# Altium PCB Copy of PCB.PcbDoc (part 1 of 3)
Units mil, origin at the board's own origin, x right, y up, seen from the top; angles counter-clockwise.
Board outline 5610.24 x 866.55 mil, 2 copper layers (Top Layer, Bottom Layer), stack 62.17 mil thick; 160 components, 90 nets, 485 pads, 247 vias.
Unrouted connection lines stored in the file: 5.
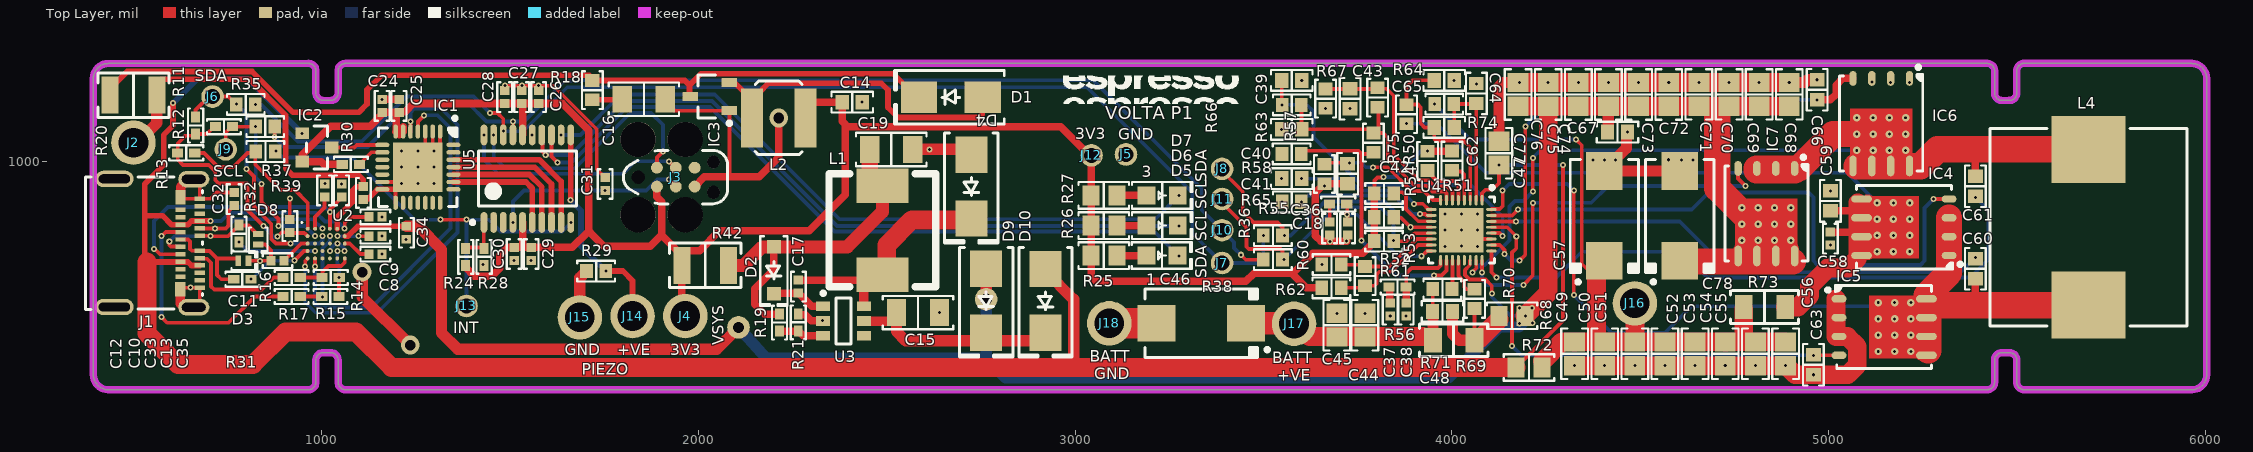
[diagram p0: Top Layer view]
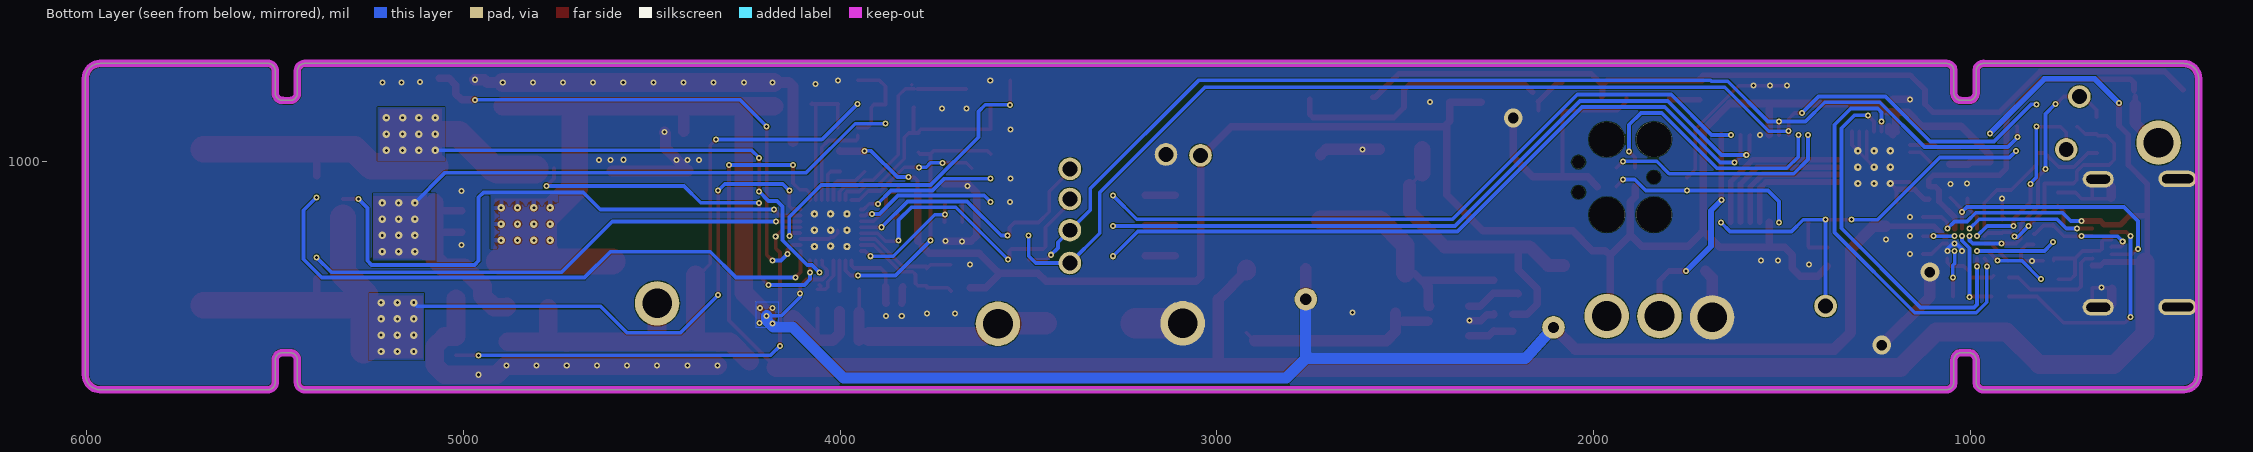
[diagram p1: Bottom Layer view, seen from below]

## Layer stack, top to bottom
Top Solder: solder mask 0.4, Solder Resist, Dk 3.5
Top Layer: signal copper 1.4
Dielectric 1: dielectric 59.3701, FR-4, Dk 4.8
Bottom Layer: signal copper 1.4
Bottom Solder: solder mask 0.4, Solder Resist, Dk 3.5

## Board outline
433.07,393.7 964.57,393.7 ccw(c964.57,413.39) 984.25,413.39 984.25,472.44 cw(c1003.94,472.44) 1003.94,492.13 1023.62,492.13 cw(c1023.62,472.44) 1043.31,472.44 1043.31,413.39 ccw(c1062.99,413.39) 1062.99,393.7 5421.26,393.7 ccw(c5421.26,413.39) 5440.94,413.39 5440.94,472.44 cw(c5460.63,472.44) 5460.63,492.13 5480.31,492.13 5480.31,492 cw(c5480.31,472.32) 5500,472.32 5500,413.26 ccw(c5519.69,413.26) 5519.69,393.58 5519.69,393.7 5964.57,393.7 ccw(c5964.57,433.07) 6003.94,433.07 6003.94,1220.47 ccw(c5964.57,1220.47) 5964.57,1259.84 5964.57,1260 5519.69,1260 5519.69,1260.12 ccw(c5519.69,1240.44) 5500,1240.44 5500,1181.38 cw(c5480.31,1181.38) 5480.31,1161.7 5480.31,1161.57 5460.63,1161.57 cw(c5460.63,1181.26) 5440.94,1181.26 5440.94,1240.32 ccw(c5421.26,1240.32) 5421.26,1260 1062.99,1260 ccw(c1062.99,1240.31) 1043.31,1240.31 1043.31,1181.26 cw(c1023.62,1181.26) 1023.62,1161.57 1003.94,1161.57 cw(c1003.94,1181.26) 984.25,1181.26 984.25,1240.31 ccw(c964.57,1240.31) 964.57,1260 964.57,1259.84 433.07,1259.84 ccw(c433.07,1220.47) 393.7,1220.47 393.7,433.07 ccw(c433.07,433.07)

## Design rules (kind name [scope] priority, off if disabled: settings)
Clearance [All] p1: gap=2 ignorepadtopadclearanceinfootprint=TRUE
MinimumSolderMaskSliver [All] p1: minsoldermaskwidth=1
PolygonConnect PolygonConnect_18 [All vs IsNamedPolygon('GND_L02_P024')] p1: connectstyle=Direct reliefconductorwidth=10 reliefentries=4 polygonreliefangle="90 Angle" airgapwidth=10
PolygonConnect PolygonConnect_17 [All vs IsNamedPolygon('NETC15_2_L02_P018')] p2: connectstyle=Direct reliefconductorwidth=10 reliefentries=4 polygonreliefangle="90 Angle" airgapwidth=10
PolygonConnect PolygonConnect_16 [All vs IsNamedPolygon('NETC15_2_L02_P022')] p3: connectstyle=Direct reliefconductorwidth=10 reliefentries=4 polygonreliefangle="90 Angle" airgapwidth=10
PolygonConnect PolygonConnect_15 [All vs IsNamedPolygon('GND_L02_P028')] p4: connectstyle=Direct reliefconductorwidth=10 reliefentries=4 polygonreliefangle="90 Angle" airgapwidth=10
PolygonConnect PolygonConnect_14 [All vs IsNamedPolygon('GND_L02_P026')] p5: connectstyle=Direct reliefconductorwidth=10 reliefentries=4 polygonreliefangle="90 Angle" airgapwidth=10
PolygonConnect PolygonConnect_13 [All vs IsNamedPolygon('GND_L02_P022')] p6: connectstyle=Direct reliefconductorwidth=10 reliefentries=4 polygonreliefangle="90 Angle" airgapwidth=10
PolygonConnect PolygonConnect_12 [All vs IsNamedPolygon('NETC61_2_L02_P020') Or  IsNamedPolygon('NETC15_2_L02_P018') Or  IsNamedPolygon('NETC60_2_L02_P002') Or  IsNamedPolygon('NETC58_2_L02_P016')] p7: connectstyle=Direct reliefconductorwidth=10 reliefentries=4 polygonreliefangle="90 Angle" airgapwidth=10
PolygonConnect PolygonConnect_11 [All vs IsNamedPolygon('GND_L02_P016')] p8: thpad.connectstyle=Direct thpad.reliefconductorwidth=10 thpad.reliefentries=4 thpad.polygonreliefangle="90 Angle" thpad.airgapwidth=10 smdpad.connectstyle=Relief smdpad.reliefconductorwidth=10 smdpad.reliefentries=4 smdpad.polygonreliefangle="90 Angle" smdpad.airgapwidth=10 via.connectstyle=Relief via.reliefconductorwidth=10 via.reliefentries=4 via.polygonreliefangle="90 Angle" via.airgapwidth=10
PolygonConnect PolygonConnect_10 [All vs IsNamedPolygon('GND_L04_P002')] p9: connectstyle=Relief reliefconductorwidth=10 reliefentries=4 polygonreliefangle="90 Angle" airgapwidth=5
PolygonConnect Test [All vs IsNamedPolygon('GND_L01_P014')] p10: connectstyle=Direct reliefconductorwidth=10 reliefentries=4 polygonreliefangle="90 Angle" airgapwidth=10
PolygonConnect PolygonConnect_9 [All vs IsNamedPolygon('GND_L01_P014')] p11: connectstyle=Direct reliefconductorwidth=10 reliefentries=4 polygonreliefangle="90 Angle" airgapwidth=10
PolygonConnect PolygonConnect_8 [All vs IsNamedPolygon('NETC1_2_L01_P010')] p12: connectstyle=Direct reliefconductorwidth=10 reliefentries=4 polygonreliefangle="90 Angle" airgapwidth=10
PolygonConnect PolygonConnect_7 [All vs IsNamedPolygon('NETC23_2_L01_P012')] p13: connectstyle=Direct reliefconductorwidth=10 reliefentries=4 polygonreliefangle="90 Angle" airgapwidth=10
PolygonConnect PolygonConnect_6 [All vs IsNamedPolygon('NETC1_2_L01_P010')] p14: connectstyle=Direct reliefconductorwidth=10 reliefentries=4 polygonreliefangle="90 Angle" airgapwidth=10
PolygonConnect PolygonConnect_5 [All vs IsNamedPolygon('NETC1_2_L01_P010')] p15: connectstyle=Direct reliefconductorwidth=10 reliefentries=4 polygonreliefangle="90 Angle" airgapwidth=10
PolygonConnect PolygonConnect_4 [All vs IsNamedPolygon('NETC7_2_L01_P008')] p16: connectstyle=Direct reliefconductorwidth=10 reliefentries=4 polygonreliefangle="90 Angle" airgapwidth=10
PolygonConnect PolygonConnect_3 [All vs IsNamedPolygon('NETC7_2_L01_P008')] p17: connectstyle=Direct reliefconductorwidth=10 reliefentries=4 polygonreliefangle="90 Angle" airgapwidth=10
PolygonConnect PolygonConnect_2 [All vs IsNamedPolygon('NETC2_2_L01_P006')] p18: connectstyle=Direct reliefconductorwidth=10 reliefentries=4 polygonreliefangle="90 Angle" airgapwidth=10
PolygonConnect "Full Connection Pour" [All vs IsNamedPolygon('GND_L01_P004')] p19: connectstyle=Direct reliefconductorwidth=10 reliefentries=4 polygonreliefangle="90 Angle" airgapwidth=10
PolygonConnect PolygonConnect_1 [All vs IsNamedPolygon('GND_L01_P004')] p20: thpad.connectstyle=Direct thpad.reliefconductorwidth=10 thpad.reliefentries=4 thpad.polygonreliefangle="90 Angle" thpad.airgapwidth=10 smdpad.connectstyle=Direct smdpad.reliefconductorwidth=10 smdpad.reliefentries=4 smdpad.polygonreliefangle="90 Angle" smdpad.airgapwidth=10 via.connectstyle=Relief via.reliefconductorwidth=10 via.reliefentries=4 via.polygonreliefangle="90 Angle" via.airgapwidth=10
PolygonConnect [All] p21: connectstyle=Relief reliefconductorwidth=10 reliefentries=4 polygonreliefangle="90 Angle" airgapwidth=10
RoutingVias [All] p1: holewidth=28 width=50 viastyle="Through Hole" minholewidth=28 minwidth=50 maxholewidth=28 maxwidth=50
SilkToSilkClearance [All] p1: silktosilkclearance=1
SilkToSolderMaskClearance [IsPad] p1: minsilkscreentomaskgap=1 clearancetoexposedcopper=TRUE
SolderMaskExpansion [All] p1: expansion=4
Width [All] p1: maxlimit=100 minlimit=6 preferedwidth=10
27 further rules are at their usual default settings.

## Classes and differential pairs
component class Charging_TI: C18 C36 C37 C38 C39 C40 C41 C42 C43 C44 C45 C46 C47 C48 J17 J18 R50 R51 R52 R53 R54 R55 R56 R57 R58 R60 R61 R62 R63 R64 R65 R66 R67 R68 R69 R70 R71 U4
component class Charging_TI_2: C49 C50 C51 C52 C53 C54 C55 C56 C57 C58 C59 C60 C61 C62 C63 C64 C65 C66 C67 C68 C69 C70 C71 C72 C73 C74 C75 C76 C77 C78 IC4 IC5 IC6 IC7 J16 L4 R72 R73 R74 R75
component class Microcontroller: C24 C25 C26 C27 C28 C29 C30 C31 D5 D6 D7 IC1 IC2 J3 J5 J6 J7 J8 J9 J10 J11 J12 J13 J14 J15 R24 R25 R26 R27 R28 R29 R30 R35 R36 R37 R38 R39 U5
component class Voltage_Regulation: C14 C15 C16 C17 C19 D1 D2 D4 D9 D10 IC3 J2 J4 L1 L2 R18 R19 R20 R21 R42 U3
component class PD_Controller: C8 C9 C10 C11 C12 C13 C32 C33 C34 C35 D3 D8 J1 R11 R12 R13 R14 R15 R16 R17 R31 R32 U2

## Components (designator, comment, footprint, x,y, rotation, side; value= is the part's Value field where it differs from the comment)
C8 "2.2 µF" "CAP 0402_1005" 1142.36,753.66 r180 top
C9 "1 µF" "CAP 0402_1005" 1142.36,801.38 r180 top
C10 "1 µF" "CAP 0402_1005" 1007.36,922.76 r270 top
C11 "1 µF" "CAP 0402_1005" 882.36,736.34 r0 top
C12 "1 µF" "CAP 0402_1005" 915,828 r270 top
C13 "1 µF" "CAP 0402_1005" 1110.24,916.34 r90 top
C14 "47 µF" "CAP 0603_1608" 2408,1157 r180 top
C15 "10 µF" "CAP 1206_3216 - 0.8MM" 2582.68,598.43 r180 top
C16 "22 µF" "CAP 1206_3216 - 0.8MM" 1855,1165 r0 top
C17 "10000 pF" "CAP 0402_1005" 2265,667.52 r270 top
C18 "33 pF" "CAP 0402_1005" 3723.39,821.64 r90 top
C19 "22 µF" "CAP 1206_3216 - 0.8MM" 2511.81,1031.5 r0 top
C24 "4.7 µF" "CAP 0402_1005" 1160.04,1147.2 r270 top
C25 "0.1 µF" "CAP 0402_1005" 1205.04,1147.2 r270 top
C26 "4.7 µF" "CAP 0402_1005" 1575.47,1170.39 r270 top
C27 "0.1 µF" "CAP 0402_1005" 1530.47,1170.39 r270 top
C28 "0.1 µF" "CAP 0402_1005" 1485.47,1170.39 r270 top
C29 "1 µF" "CAP 0402_1005" 1555.75,754.01 r90 top
C30 "10000 pF" "CAP 0402_1005" 1510.75,754.01 r90 top
C31 "0.1 µF" "CAP 0402_1005" 1751.97,939.76 r270 top
C32 "27 pF" "CAP 0402_1005" 767.36,899.61 r270 top
C33 "27 pF" "CAP 0402_1005" 1052.36,922.76 r270 top
C34 "1 µF" "CAP 0402_1005" 1224.41,810.37 r90 top
C35 "1 µF" "CAP 0402_1005" 1142.36,852.49 r180 top
C36 "4700 pF" "CAP 0402_1005" 3675.71,821.64 r90 top
C37 "680 pF" "CAP 0402_1005" 3836.54,606.54 r90 top
C38 "15 pF" "CAP 0402_1005" 3878.38,606.54 r90 top
C39 "2.2 µF" "CAP 0603_1608" 3575,1215 r180 top
C40 "1 µF" "CAP 0603_1608" 3575,1085 r0 top
C41 "100 pF" "CAP 0603_1608" 3575,954.25 r0 top
C42 "100 pF" "CAP 0603_1608" 3723.39,967.01 r90 top
C43 "100 pF" "CAP 0603_1608" 3730,1166.37 r90 top
C44 "10 µF" "CAP 0805_2012" 3769.41,565 r270 top
C45 "10 µF" "CAP 0805_2012" 3695,565 r270 top
C46 "33 µF" "CAP POL 2917_7343" 3334.65,570 r180 top
C47 "0.47 µF" "CAP 0805_2012" 4125,1021.5 r270 top
C48 "0.1 µF" "CAP 0603_1608" 3975.08,601.5 r180 top
C49 "10 µF" "CAP 0805_2012" 4325.91,488.96 r90 top
C50 "10 µF" "CAP 0805_2012" 4405.91,488.96 r90 top
C51 "10 µF" "CAP 0805_2012" 4485.91,488.96 r90 top
C52 "10 µF" "CAP 0805_2012" 4565.91,488.96 r90 top
C53 "10 µF" "CAP 0805_2012" 4645.91,488.96 r90 top
C54 "10 µF" "CAP 0805_2012" 4725.91,488.96 r90 top
C55 "10 µF" "CAP 0805_2012" 4805.91,488.96 r90 top
C56 "10 µF" "CAP 0805_2012" 4885.91,488.96 r90 top
C57 "33 µF" "CAP POL 2917_7343" 4405,855 r90 top
C58 "1000 pF" "CAP 0402_1005" 5004.77,795 r90 top
C59 "10000 pF" "CAP 0603_1608" 5005,895 r270 top
C60 "0.047 µF" "CAP 0603_1608" 5390,715 r270 top
C61 "0.047 µF" "CAP 0603_1608" 5390,934.09 r90 top
C62 "10000 pF" "CAP 0603_1608" 3980,1090 r0 top
C63 "150 pF" "CAP 0603_1608" 4960,460 r90 top
C64 "0.033 µF" "CAP 0603_1608" 4065,1180 r270 top
C65 "0.033 µF" "CAP 0603_1608" 3979.68,1215.01 r180 top
C66 "150 pF" "CAP 0603_1608" 4970,1190 r270 top
C67 "10000 pF" "CAP 0603_1608" 4440,1077.52 r180 top
C68 "10 µF" "CAP 0805_2012" 4895.91,1177.76 r270 top
C69 "10 µF" "CAP 0805_2012" 4815.91,1177.76 r270 top
C70 "10 µF" "CAP 0805_2012" 4735.91,1177.76 r270 top
C71 "10 µF" "CAP 0805_2012" 4655.91,1177.76 r270 top
C72 "10 µF" "CAP 0805_2012" 4575.91,1177.55 r270 top
C73 "10 µF" "CAP 0805_2012" 4495.91,1177.55 r270 top
C74 "10 µF" "CAP 0805_2012" 4415.91,1177.55 r270 top
C75 "10 µF" "CAP 0805_2012" 4335.91,1177.55 r270 top
C76 "10 µF" "CAP 0805_2012" 4255.91,1177.55 r270 top
C77 "10 µF" "CAP 0805_2012" 4175.91,1177.55 r270 top
C78 "33 µF" "CAP POL 2917_7343" 4605,855 r90 top
D1 "B230-13-F" "DO214AA SMB" 2670,1170 r180 top
D2 "1N4148W-TP" SOD-123 2200,710.79 r270 top
D3 "LXES15AAA1-153" 0402 792,736 r0 top
D4 "B230-13-F" "DO214AA SMB" 2724.41,933.07 r270 top
D5 "White" "LED 0805_2012" 3230.43,750 r0 top
D6 "White" "LED 0805_2012" 3231.06,829.53 r0 top
D7 "White" "LED 0805_2012" 3231.06,909.53 r0 top
D8 "LXES15AAA1-153" 0402 831,793.04 r270 top
D9 "B230-13-F" "DO214AA SMB" 2763.78,629.92 r270 top
D10 "B230-13-F" "DO214AA SMB" 2921.26,629.65 r270 top
IC1 "CP2102N-A02-GQFN28R" "SILICON LABS QFN-28 5x5MM" 1255.04,984.53 r270 top
IC2 "DMN67D8L-7" "DIODES SOT-23-3" 987,1037 r0 top
IC3 "HT7750B" SOT95P280X145-3N 2030,1172 r180 top
IC4 "BSC020N03MSGATMA1" "INFINEON PG-TDSON-8 6.15X5.32MM" 5200,825 r180 top
IC5 "BSC020N03MSGATMA1" "INFINEON PG-TDSON-8 6.15X5.32MM" 5147.87,560 r0 top
IC6 "BSC020N03MSGATMA1" "INFINEON PG-TDSON-8 6.15X5.32MM" 5140,1100 r270 top
IC7 "BSC020N03MSGATMA1" "INFINEON PG-TDSON-8 6.15X5.32MM" 4835,861.06 r270 top
J1 "1054500101" "Molex 1054500101" 650.39,782.58 r270 top
J2 "Large Board Solder Point" "LARGE SOLDER POINT" 500,1049.56 r0 top
J3 "ICD connector" TC2030-MCP 1939.76,958.11 r0 top
J4 "Large Board Solder Point" "LARGE SOLDER POINT" 1965,589.21 r0 top
J5 "Small Board Solder Point" "SMALL SOLDER POINT" 3135,1018.27 r180 top
J6 "Small Board Solder Point" "SMALL SOLDER POINT" 710,1172 r0 top
J7 "Small Board Solder Point" "SMALL SOLDER POINT" 3390,730 r0 top
J8 "Small Board Solder Point" "SMALL SOLDER POINT" 3390,980 r0 top
J9 "Small Board Solder Point" "SMALL SOLDER POINT" 744.92,1031.69 r0 top
J10 "Small Board Solder Point" "SMALL SOLDER POINT" 3390,817.13 r180 top
J11 "Small Board Solder Point" "SMALL SOLDER POINT" 3390,900 r0 top
J12 "Small Board Solder Point" "SMALL SOLDER POINT" 3043.31,1015.75 r270 top
J13 "Small Board Solder Point" "SMALL SOLDER POINT" 1384,616 r180 top
J14 "Large Board Solder Point" "LARGE SOLDER POINT" 1825,589.21 r0 top
J15 "Large Board Solder Point" "LARGE SOLDER POINT" 1685,585.79 r0 top
J16 "Large Board Solder Point" "LARGE SOLDER POINT" 4485.91,623 r0 top
J17 "Large Board Solder Point" "LARGE SOLDER POINT" 3581.13,568.82 r0 top
J18 "Large Board Solder Point" "LARGE SOLDER POINT" 3090.55,570 r0 top
L1 "10uH" 0630CDMCCDS-100MC 2488.19,817.13 r90 top
L2 "47 µH" "TAIYO YUDEN NRS5030" 2213,1115 r180 top
L4 "4.7 µH" "WURTH WE-HCI 1365" 5690,825 r180 top
R11 "2.2 kOhms" "RES 0402_1005" 740,1092 r0 top
R12 "2.2 kOhms" "RES 0402_1005" 665,1095 r90 top
R13 "200 kOhms" "RES 0402_1005" 640,1022.42 r180 top
R14 "649 kOhms" "RES 0402_1005" 1023.58,691.34 r0 top
R15 "649 kOhms" "RES 0402_1005" 1022.64,641.34 r0 top
R16 "120 kOhms" "RES 0402_1005" 920,691.34 r0 top
R17 "120 kOhms" "RES 0402_1005" 920,641.34 r0 top
R18 "150 mOhms" "RES 0603_1608" 1718,1189 r90 top
R19 "100 kOhms" "RES 0402_1005" 2215,571.77 r90 top
R20 "0 Ohms" "RES 1210_3225" 500,1176 r0 top
R21 "32.4 kOhms" "RES 0402_1005" 2265,572.52 r270 top
R24 "510 Ohms" "RES 0402_1005" 1381.94,746.4 r90 top
R25 "10 Ohms" "RES 0805_2012" 3076.06,749.53 r180 top
R26 "10 Ohms" "RES 0805_2012" 3076.06,829.53 r180 top
R27 "10 Ohms" "RES 0805_2012" 3076.06,909.61 r180 top
R28 "510 Ohms" "RES 0402_1005" 1430.91,746.4 r90 top
R29 "1 MOhms" "RES 0603_1608" 1728.35,708.66 r0 top
R30 "1 kOhms" "RES 0402_1005" 1077,992 r0 top
R31 "1 Ohms" "RES 0402_1005" 789,687 r180 top
R32 "1 Ohms" "RES 0402_1005" 780.16,808 r90 top
R35 "0 Ohms" "RES 0603_1608" 797.97,1151.29 r0 top
R36 "0 Ohms" "RES 0603_1608" 3525,802.56 r0 top
R37 "0 Ohms" "RES 0603_1608" 849.97,1092.24 r0 top
R38 "0 Ohms" "RES 0603_1608" 3525,738.93 r0 top
R39 "0 Ohms" "RES 0603_1608" 850.39,1026.1 r0 top
R42 "0 Ohms" "RES 1210_3225" 2018.01,723.78 r180 top
R50 "10 kOhms" "RES 0603_1608" 3935.52,1001.22 r90 top
R51 "10 kOhms" "RES 0603_1608" 4000.52,1001.81 r90 top
R52 "10 kOhms" "RES 0603_1608" 3820,788.11 r180 top
R53 "10 kOhms" "RES 0603_1608" 3820,851.48 r180 top
R54 "10 kOhms" "RES 0603_1608" 3820,915 r180 top
R55 "40.2 kOhms" "RES 0402_1005" 3698.39,886.97 r0 top
R56 "15 kOhms" "RES 0402_1005" 3856.1,666.54 r0 top
R57 "150 kOhms" "RES 0603_1608" 3791.97,1049.56 r270 top
R58 "100 kOhms" "RES 0603_1608" 3574.8,1019.68 r180 top
R60 "300 kOhms" "RES 0603_1608" 3680.59,725.72 r180 top
R61 "2 MOhms" "RES 0603_1608" 3770,695.27 r270 top
R62 "10 kOhms" "RES 0603_1608" 3680.35,664.27 r0 top
R63 "10 Ohms" "RES 0603_1608" 3575,1150 r0 top
R64 "383 kOhms" "RES 0603_1608" 3803.15,1169.29 r270 top
R65 "30.1 kOhms" "RES 0603_1608" 3575,892.6 r0 top
R66 "191 kOhms" "RES 0603_1608" 3661.59,966.42 r90 top
R67 "220 kOhms" "RES 0603_1608" 3665,1166.37 r90 top
R68 "0 Ohms" "RES 0805_2012" 4160,590 r180 top
R69 "5 mOhms" "RES 1206_3216" 4005,525 r180 top
R70 "10 Ohms" "RES 0603_1608" 4060.48,635 r270 top
R71 "10 Ohms" "RES 0603_1608" 3975,660.72 r180 top
R72 "0 Ohms" "RES 0805_2012" 4205,452.63 r0 top
R73 "5 mOhms" "RES 1206_3216" 4830,613.29 r0 top
R74 "4.99 Ohms" "RES 0603_1608" 3980,1152 r180 top
R75 "4.99 Ohms" "RES 0603_1608" 3879.68,1125.01 r270 top
U2 "MAX77958EWV+" BGA30C50P6X5_307X262X64 1011.58,781.69 r0 top
U3 "RT8258GE" SOT100P279X130-6N 2385,576 r0 top
U4 "BQ25731RSNR" QFN40P400X400X80_HS-33N 4025.28,817.13 r270 top
U5 "STM32F030F4P6" TSOP65P640X120-20N 1545.75,954.01 r90 top

## Footprints (in the part's own frame and the unit in brackets; to place one, negate y for a bottom-side part, rotate by r counter-clockwise, add the part's x,y. Pads: shape width x height; smd on the part's side, far side on the other; paste and mask are expansions set on the pad)
0402 [mm] "SODFL, 2-Leads, Body 0.675x1.075mm, IPC Medium Density"
  rect 0.4x0.7 smd: 1(-0.35,0) 2(0.35,0)
  silkscreen extent -0.8,-0.63 0.92,0.63, body extent -0.51,-0.31 0.5,0.3, height 0.45
0630CDMCCDS-100MC [mm] "SMD,7x6.6x2.8mm"
  rect 2.35x3.5 smd: 1(-3,0) 2(3,0)
  silkscreen extent -3.8,-3.6 3.8,3.6, body extent -3.5,-3.3 3.5,3.3, height 3
BGA30C50P6X5_307X262X64 [mm] "BGA, 30-Leads, Body 3.07x2.62mmx0.64mm, Pitch 0.50mm"
  round 0.26 smd: A1(-1.25,1) A2(-0.75,1) A3(-0.25,1) A4(0.25,1) A5(0.75,1) A6(1.25,1) B1(-1.25,0.5) B2(-0.75,0.5) B3(-0.25,0.5) B4(0.25,0.5) B5(0.75,0.5) B6(1.25,0.5) C1(-1.25,0) C2(-0.75,0) C3(-0.25,0) C4(0.25,0) C5(0.75,0) C6(1.25,0) D1(-1.25,-0.5) D2(-0.75,-0.5) D3(-0.25,-0.5) D4(0.25,-0.5) D5(0.75,-0.5) D6(1.25,-0.5) E1(-1.25,-1) E2(-0.75,-1) E3(-0.25,-1) E4(0.25,-1) E5(0.75,-1) E6(1.25,-1)
  silkscreen extent -1.69,1.37 -1.59,1.46, body extent -1.54,-1.31 1.54,1.31, height 0.64
"CAP 0402_1005" [mm] "Chip Capacitor, 2-Leads, Body 1.02x0.51mm, IPC Medium Density"
  rect 0.6x0.64 smd: 1(-0.44,0) 2(0.44,0)
  silkscreen extent -1,-0.5 1,0.5, body extent -0.5,-0.26 0.5,0.26, height 0.52
"CAP 0603_1608" [mm] "Chip Capacitor, 2-Leads, Body 1.60x0.80mm, IPC Medium Density"
  rect 0.9x1 smd: 1(-0.675,0) 2(0.675,0)
  silkscreen extent -1.4,-0.7 1.4,0.7, body extent -0.8,-0.41 0.8,0.41, height 0.82
"CAP 0805_2012" [mm] "Chip Capacitor, 2-Leads, Body 2.00x1.20mm, IPC Medium Density"
  rect 1.3x1.4 smd: 1(-0.8,0) 2(0.8,0)
  silkscreen extent -1.7,-0.9 1.7,0.9, body extent -1,-0.64 1,0.64, height 1.26
"CAP 1206_3216 - 0.8MM" [mm] "Chip Capacitor, 2-Leads, Body 3.25x1.60mm, IPC Medium Density"
  rect 1.3x1.8 smd: 1(-1.45,0) 2(1.45,0)
  silkscreen extent -2.37,-1.12 2.37,1.12, body extent -1.6,-0.8 1.6,0.8, height 0.8
"CAP POL 2917_7343" [mm] "Molded Capacitor, 2-Leads, Body 7.30x4.30mm, IPC Medium Density"
  rect 2.55x2.45 smd: 1(-3.025,0) 2(3.025,0)
  silkscreen extent -4.58,-2.3 3.8,2.3, body extent -3.65,-2.15 3.65,2.15, height 4.1
"DIODES SOT-23-3" [mm] "SOT23, 3-Leads, Body 2.90x2.40mm, Pitch 0.95mm, IPC Medium Density"
  rect 0.9x0.8 smd: 1(-1,0.95) 2(-1,-0.95) 3(1,0)
  silkscreen extent -0.7,-1.45 0.7,1.45, body extent -1.41,-1.45 1.41,1.45, height 1.5
"DO214AA SMB" [mm] "Molded Diode, 2-Leads, Body 4.31x3.62mm, IPC Medium Density"
  rect 2.45x2.15 smd: 1(-2.15,0) 2(2.15,0)
  silkscreen extent -3.6,-1.8 3.8,1.8, body extent -2.6,-1.8 2.6,1.8, height 2.4
"INFINEON PG-TDSON-8 6.15X5.32MM" [mm] "TDSON, 8-Leads, Body 6.15x5.32mm, Pitch 1.27mm, Thermal Pad 3.60x4.05mm, IPC Medium Density"
  oval 1x0.5 smd: 1(-3.05,1.905) 2(-3.05,0.635) 3(-3.05,-0.635) 4(-3.05,-1.905)
  oval 1.4x0.5 smd: 5(2.85,-1.905) 6(2.85,-0.635) 7(2.85,0.635) 8(2.85,1.905)
  Top Layer region: -1,2.1 -1,-2.1 2.059,-2.1 2.189,-2.126 2.3,-2.2 2.3,-2.2 2.6,-2.2 2.6,2.2 2.3,2.2 2.189,2.126 2.059,2.1 2.059,2.1
  silkscreen extent -3.93,-2.8 3.2,2.8, body extent -3.18,-2.74 3.18,2.75, height 1.1
"LARGE SOLDER POINT" [mm]
  round 3 hole 2: 1(0,0)
"LED 0805_2012" [mm] "Chip Diode, 2-Leads, Body 2.00x1.25mm, IPC Medium Density"
  rect 1.2x1.2 smd: 1(-1.05,0) 2(1.05,0)
  silkscreen extent -2.03,-0.9 2.03,0.9, body extent -1,-0.62 1,0.63, height 0.9
"Molex 1054500101" [mm] "USB-C Receptacle Connector 24 Position Surface Mount, 24 Position, Body 8.94x7.90mm"
  rect 0.3x0.7 smd: A1(-3,0.655) A2(-2.5,0.655) A3(-2,0.655) A4(-1.5,0.655) A5(-1,0.655) A6(-0.5,0.655) A7(0.5,0.655) A8(1,0.655) A9(1.5,0.655) A10(2,0.655) A11(2.5,0.655) A12(3,0.655) B2(2.25,-0.645) B3(1.75,-0.645) B4(1.25,-0.645) B5(0.75,-0.645) B6(0.25,-0.645) B7(-0.25,-0.645) B8(-0.75,-0.645) B9(-1.25,-0.645) B10(-1.75,-0.645) B11(-2.25,-0.645)
  rect 1x0.7 smd: B1(3.1,-0.655) B12(-3.1,-0.645)
  oval 1.1x2.6 hole 2.1 slot 0.6 at 0 deg: S(-4.34,-5.105) S(4.3,-5.105)
  oval 1.1x2.1 hole 1.6 slot 0.6 at 0 deg: S(-4.32,0.245) S(4.32,0.245)
  silkscreen extent -4.47,-7.07 4.47,0.83, body extent -4.47,-7.07 4.47,0.83, height 3.21
QFN40P400X400X80_HS-33N [mm] "QFN, 32-Leads, Body 4.00x4.00mm, Pitch 0.40mm, Thermal Pad 3.00x3.00mm, IPC Medium Density"
  oval 0.7x0.2 smd mask+0.05: 1(-2.025,1.4) 2(-2.025,1) 3(-2.025,0.6) 4(-2.025,0.2) 5(-2.025,-0.2) 6(-2.025,-0.6) 7(-2.025,-1) 8(-2.025,-1.4) 17(2.025,-1.4) 18(2.025,-1) 19(2.025,-0.6) 20(2.025,-0.2) 21(2.025,0.2) 22(2.025,0.6) 23(2.025,1) 24(2.025,1.4)
  oval 0.2x0.7 smd mask+0.05: 9(-1.4,-2.025) 10(-1,-2.025) 11(-0.6,-2.025) 12(-0.2,-2.025) 13(0.2,-2.025) 14(0.6,-2.025) 15(1,-2.025) 16(1.4,-2.025) 25(1.4,2.025) 26(1,2.025) 27(0.6,2.025) 28(0.2,2.025) 29(-0.2,2.025) 30(-0.6,2.025) 31(-1,2.025) 32(-1.4,2.025)
  round 0.5 hole 0.2: 33(-1.1,1.1) 33(-1.1,0) 33(-1.1,-1.1) 33(0,1.1) 33(0,-1.1) 33(1.075,0) 33(1.1,1.1) 33(1.1,-1.1)
  rect 3x3 smd mask+0.05: 33(0,0)
  silkscreen extent -3,-2.22 2.22,2.22, body extent -2.07,-2.07 2.07,2.07, height 0.8
"RES 0402_1005" [mm] "Chip Resistor, 2-Leads, Body 1.0x0.5mm, IPC Medium Density"
  rect 0.75x0.6 smd: 1(-0.575,0) 2(0.575,0)
  silkscreen extent -1.14,-0.51 1.14,0.51, body extent -0.5,-0.25 0.5,0.25, height 0.35
"RES 0603_1608" [mm] "Chip Resistor, 2-Leads, Body 1.60x0.80mm, IPC Medium Density"
  rect 0.85x0.95 smd: 1(-0.65,0) 2(0.65,0)
  silkscreen extent -1.27,-0.7 1.27,0.7, body extent -0.8,-0.4 0.8,0.4, height 0.45
"RES 0805_2012" [mm] "Chip Resistor, 2-Leads, Body 2.00x1.25mm, IPC Medium Density"
  rect 1.15x1.35 smd: 1(-0.875,0) 2(0.875,0)
  silkscreen extent -1.7,-0.9 1.7,0.9, body extent -1,-0.62 1,0.63, height 0.6
"RES 1206_3216" [mm] "Chip Resistor, 2-Leads, Body 3.13x1.55mm, IPC Medium Density"
  rect 1.2x1.65 smd: 1(-1.4,0) 2(1.4,0)
  silkscreen extent -2.3,-1.1 2.3,1.1, body extent -1.6,-0.8 1.6,0.8, height 0.6
"RES 1210_3225" [mm] "Chip Resistor, 2-Leads, Body 3.1x2.6mm, IPC Medium Density"
  rect 1.15x2.5 smd: 1(-1.575,0) 2(1.575,0)
  silkscreen extent -2.4,-1.5 2.4,1.5, body extent -1.6,-1.25 1.6,1.25, height 0.7
"SILICON LABS QFN-28 5x5MM" [mm] "QFN, 28-Leads, Body 5.00x5.00mm, Pitch 0.50mm, Thermal Pad 3.35x3.35mm, IPC Medium Density"
  oval 0.95x0.3 smd: 1(-2.4,1.5) 2(-2.4,1) 3(-2.4,0.5) 4(-2.4,0) 5(-2.4,-0.5) 6(-2.4,-1) 7(-2.4,-1.5) 15(2.4,-1.5) 16(2.4,-1) 17(2.4,-0.5) 18(2.4,0) 19(2.4,0.5) 20(2.4,1) 21(2.4,1.5)
  oval 0.3x0.95 smd: 8(-1.5,-2.4) 9(-1,-2.4) 10(-0.5,-2.4) 11(0,-2.4) 12(0.5,-2.4) 13(1,-2.4) 14(1.5,-2.4) 22(1.5,2.4) 23(1,2.4) 24(0.5,2.4) 25(0,2.4) 26(-0.5,2.4) 27(-1,2.4) 28(-1.5,2.4)
  rect 3.35x3.35 smd: 29(0,0)
  silkscreen extent -3.42,-2.65 2.65,2.65, body extent -2.51,-2.51 2.51,2.51, height 0.8
"SMALL SOLDER POINT" [mil]
  round 60 hole 39.37: 1(0,0)
SOD-123 [mm] "SOD, 2-Leads, Body 1.55x3.70mm, IPC Medium Density"
  rect 0.9x0.95 smd: 1(-1.575,0) 2(1.575,0)
  silkscreen extent -2.3,-0.92 2.41,0.92, body extent -1.86,-0.78 1.86,0.77, height 1.35
SOT95P280X145-3N [mm] "SOT23, 3-Leads, Body 2.90x2.80mm, Pitch 0.95mm, IPC Medium Density"
  rect 1.05x0.6 smd: 1(-1.325,0.95) 2(-1.325,-0.95) 3(1.325,0)
  silkscreen extent -1.45,-1.45 0.8,1.92, body extent -0.8,-1.45 0.8,1.45, height 1.45
SOT100P279X130-6N [mm] "SOT23, 6-Leads, Body 2.90x2.79mm, Pitch 1.00mm, IPC Medium Density"
  rect 0.95x0.65 smd: 1(-1.375,1) 2(-1.375,0) 3(-1.375,-1) 4(1.375,-1) 5(1.375,0) 6(1.375,1)
  silkscreen extent -1.5,-1.55 0.5,2, body extent -0.9,-1.55 0.9,1.55, height 1.3
"TAIYO YUDEN NRS5030" [mm] "Inductor, 2-Leads,Taiyo Yuden, NRS5030T4R7MMGJV"
  rect 1.5x4 smd: 1(-1.8,0) 2(1.8,0)
  silkscreen extent -1.57,-2.5 1.59,2.47, body extent -2.5,-2.5 2.5,2.5, height 3
TC2030-MCP [mm] "Conector ICD en placa"
  round 0.8 smd paste-0.4: 1(-1.27,-0.635) 2(-1.27,0.635) 3(0,-0.635) 4(0,0.635) 5(1.27,-0.635) 6(1.27,0.635)
  round 2.375 hole 2.375 unplated mask+0: ""(-2.54,-2.54) ""(-2.54,2.54) ""(0.635,-2.54) ""(0.635,2.54)
  round 0.85 hole 0.9 unplated mask+0: ""(-2.54,0) ""(2.54,-1.016) ""(2.54,1.016)
  silkscreen extent -3.54,-1.8 3.5,1.8, body extent -3.54,-1.8 3.5,1.8
TSOP65P640X120-20N [mm] "TSOP, 20-Leads, Body 6.50x4.40mm, Pitch 0.65mm, IPC Medium Density"
  oval 1.4x0.45 smd mask+0.05: 1(-2.95,2.925) 2(-2.95,2.275) 3(-2.95,1.625) 4(-2.95,0.975) 5(-2.95,0.325) 6(-2.95,-0.325) 7(-2.95,-0.975) 8(-2.95,-1.625) 9(-2.95,-2.275) 10(-2.95,-2.925) 11(2.95,-2.925) 12(2.95,-2.275) 13(2.95,-1.625) 14(2.95,-0.975) 15(2.95,-0.325) 16(2.95,0.325) 17(2.95,0.975) 18(2.95,1.625) 19(2.95,2.275) 20(2.95,2.925)
  silkscreen extent -3.07,-3.3 1.85,3.82, body extent -2.25,-3.3 2.25,3.3, height 1.2
"WURTH WE-HCI 1365" [mm] "SMT Flat Wire High Current Inductor, body 12.8x12.8mm"
  rect 5x4.5 smd: 1(0,5.25) 2(0,-5.25)
  silkscreen extent -6.65,-6.65 6.65,6.65, body extent -6.4,-6.5 6.4,6.5, height 6.2

## Part data
C8: library part CL05A225KP7NSB8, "CAP CER 2.2UF 10V X5R 0402", Device Package="0402 (1005 Metric)", manufacturer="Samsung Electro-Mechanics", Operating Temperature="-55°C ~ 85°C", Supplier Part Number 1=1276-6820-1-ND, Temperature Coefficient=X5R, Tolerance=±10%, Voltage - Rated=10V, Applications="General Purpose", Capacitance="2.2 µF", componentlink1description=Datasheet, componentlink1url=http://www.samsungsem.com/kr/support/product-search/mlcc/CL05A225KP7NSB8.jsp, componentlink2description="DigiKey Link", componentlink2url=https://www.digikey.com/en/products/detail/samsung-electro-mechanics/CL05A225KP7NSB8/5961304, lastupdated="9/08/2022 12:01:17 PM", Lifecycle Status=Active, Minimum Order=1, Mounting Type="Surface Mount, MLCC", Package / Case="0402 (1005 Metric)", packaging=TapeAndReel, partid=1994, Part Number=CL05A225KP7NSB8, Part Status=Active, price=0.05, series=CL, Size / Dimension="0.039\" L x 0.020\" W (1.00mm x 0.50mm)", Supplier 1=DigiKey, Thickness (Max)="0.031\" (0.80mm)"
C9 C10 C11 C12: library part JMK105BJ105MVHF, "CAP CER 1UF 6.3V X5R 0402", Device Package="0402 (1005 Metric)", manufacturer="Taiyo Yuden", Operating Temperature="-55°C ~ 85°C", Ratings=AEC-Q200, Supplier Part Number 1=587-6273-1-ND, Temperature Coefficient=X5R, Tolerance=±20%, Voltage - Rated=6.3V, Applications="Automotive, SMPS Filtering", Capacitance="1 µF", componentlink1description=Datasheet, componentlink1url="https://ds.yuden.co.jp/TYCOMPAS/ut/detail?pn=JMK105BJ105MVHF &u=M", componentlink2description="DigiKey Link", componentlink2url=https://www.digikey.com/en/products/detail/taiyo-yuden/JMK105BJ105MVHF/7403909, lastupdated="9/08/2022 12:01:17 PM", Lifecycle Status=Active, Minimum Order=1, Mounting Type="Surface Mount, MLCC", Package / Case="0402 (1005 Metric)", packaging=TapeAndReel, partid=1876, Part Number=JMK105BJ105MVHF, Part Status=Active, price=0.01, series=M, Size / Dimension="0.039\" L x 0.020\" W (1.00mm x 0.50mm)", Supplier 1=DigiKey, Thickness (Max)="0.022\" (0.55mm)"
C13: library part 885012105012, "CAP CER 1UF 10V X5R 0402", Device Package="0402 (1005 Metric)", manufacturer="Würth Elektronik", Operating Temperature="-55°C ~ 85°C", Supplier Part Number 1=732-7489-1-ND, Temperature Coefficient=X5R, Tolerance=±20%, Voltage - Rated=10V, Applications="General Purpose", Capacitance="1 µF", componentlink1description=Datasheet, componentlink1url=https://katalog.we-online.de/pbs/datasheet/885012105012.pdf, componentlink2description="DigiKey Link", componentlink2url=https://www.digikey.com/en/products/detail/würth-elektronik/885012105012/5453344, lastupdated="9/08/2022 12:01:18 PM", Lifecycle Status=Active, Minimum Order=1, Mounting Type="Surface Mount, MLCC", Package / Case="0402 (1005 Metric)", packaging=TapeAndReel, partid=1807, Part Number=885012105012, Part Status=Active, price=0.16, series=WCAP-CSGP, Size / Dimension="0.039\" L x 0.020\" W (1.00mm x 0.50mm)", Supplier 1=DigiKey, Thickness (Max)="0.022\" (0.55mm)"
C14: library part GRM188R60G476ME15D, "CAP CER 47UF 4V X5R 0603", Device Package="0603 (1608 Metric)", manufacturer="Murata Electronics", Operating Temperature="-55°C ~ 85°C", Supplier Part Number 1=490-13246-1-ND, Temperature Coefficient=X5R, Tolerance=±20%, Voltage - Rated=4V, Applications="General Purpose", Capacitance="47 µF", componentlink1description=Datasheet, componentlink1url=https://www.murata.com/~/media/webrenewal/support/library/catalog/products/capacitor/mlcc/c02e.ashx?la=en-us, componentlink2description="DigiKey Link", componentlink2url=https://www.digikey.com/en/products/detail/murata-electronics/GRM188R60G476ME15D/5877409, lastupdated="9/08/2022 12:02:56 PM", Lifecycle Status=Active, Minimum Order=1, Mounting Type="Surface Mount, MLCC", Package / Case="0603 (1608 Metric)", packaging=TapeAndReel, partid=5462, Part Number=GRM188R60G476ME15D, Part Status=Active, price=0.13, series=GRM, Size / Dimension="0.063\" L x 0.031\" W (1.60mm x 0.80mm)", Supplier 1=DigiKey, Thickness (Max)="0.039\" (1.00mm)"
C15: library part GRM31CR71E106MA12K, "CAP CER 10UF 25V X7R 1206", Device Package="1206 (3216 Metric)", manufacturer="Murata Electronics", Operating Temperature="-55°C ~ 125°C", Supplier Part Number 1=490-GRM31CR71E106MA12KCT-ND, Temperature Coefficient=X7R, Tolerance=±20%, Voltage - Rated=25V, Applications="General Purpose", Capacitance="10 µF", componentlink1description=Datasheet, componentlink1url=https://search.murata.co.jp/Ceramy/image/img/A01X/G101/ENG/GRM31CR71E106MA12-01CA.pdf, componentlink2description="DigiKey Link", componentlink2url=https://www.digikey.com/en/products/detail/murata-electronics/GRM31CR71E106MA12K/13904832, lastupdated="9/08/2022 12:05:16 PM", Lifecycle Status=Active, Minimum Order=1, Mounting Type="Surface Mount, MLCC", Package / Case="1206 (3216 Metric)", packaging=TapeAndReel, partid=30277, Part Number=GRM31CR71E106MA12K, Part Status=Active, price=0.07, series=GRM, Size / Dimension="0.126\" L x 0.063\" W (3.20mm x 1.60mm)", Supplier 1=DigiKey, Thickness (Max)="0.071\" (1.80mm)"
C16 C19: library part GCM31CR70J226KE23L, "CAP CER 22UF 6.3V X7R 1206", Device Package="1206 (3216 Metric)", manufacturer="Murata Electronics", Operating Temperature="-55°C ~ 125°C", Ratings=AEC-Q200, Supplier Part Number 1=490-4843-1-ND, Temperature Coefficient=X7R, Tolerance=±10%, Voltage - Rated=6.3V, Applications=Automotive, Capacitance="22 µF", componentlink1description=Datasheet, componentlink1url=https://www.murata.com/~/media/webrenewal/support/library/catalog/products/capacitor/mlcc/c03e.ashx?la=en-us, componentlink2description="DigiKey Link", componentlink2url=https://www.digikey.com/en/products/detail/murata-electronics/GCM31CR70J226KE23L/1763914, lastupdated="9/08/2022 12:05:38 PM", Lifecycle Status=Active, Minimum Order=1, Mounting Type="Surface Mount, MLCC", Package / Case="1206 (3216 Metric)", packaging=TapeAndReel, partid=19505, Part Number=GCM31CR70J226KE23L, Part Status=Active, price=0.19, series=GCM, Size / Dimension="0.126\" L x 0.063\" W (3.20mm x 1.60mm)", Supplier 1=DigiKey, Thickness (Max)="0.071\" (1.80mm)"
C17: library part VJ0402Y103JXQCW1BC, "CAP CER 10000PF 10V X7R 0402", Device Package="0402 (1005 Metric)", manufacturer="Vishay Vitramon", Operating Temperature="-55°C ~ 125°C", Supplier Part Number 1=720-1645-1-ND, Temperature Coefficient=X7R, Tolerance=±5%, Voltage - Rated=10V, Applications="General Purpose", Capacitance="10000 pF", componentlink1description=Datasheet, componentlink1url=https://www.vishay.com/docs/28548/vjw1bcbascomseries.pdf, componentlink2description="DigiKey Link", componentlink2url=https://www.digikey.com/en/products/detail/vishay-vitramon/VJ0402Y103JXQCW1BC/8301965, lastupdated="9/08/2022 12:01:13 PM", Lifecycle Status=Active, Minimum Order=1, Mounting Type="Surface Mount, MLCC", Package / Case="0402 (1005 Metric)", packaging=TapeAndReel, partid=4459, Part Number=VJ0402Y103JXQCW1BC, Part Status=Active, price=0.01, series=VJ, Size / Dimension="0.039\" L x 0.020\" W (1.00mm x 0.50mm)", Supplier 1=DigiKey, Thickness (Max)="0.022\" (0.55mm)"
C18: library part UMK105CH330JVHF, "CAP CER 33PF 50V CH 0402", Device Package="0402 (1005 Metric)", manufacturer="Taiyo Yuden", Ratings=AEC-Q200, Supplier Part Number 1=587-5079-1-ND, Temperature Coefficient=CH, Tolerance=±5%, Voltage - Rated=50V, Applications=Automotive, Capacitance="33 pF", componentlink2description="DigiKey Link", componentlink2url=https://www.digikey.com/en/products/detail/taiyo-yuden/UMK105CH330JVHF/6563672, lastupdated="14/08/2022 9:05:56 PM", Lifecycle Status=Active, Minimum Order=1, Mounting Type="Surface Mount, MLCC", Package / Case="0402 (1005 Metric)", packaging=TapeAndReel, partid=1883, Part Number=UMK105CH330JVHF, Part Status=Active, price=0.01, series=M, Size / Dimension="0.039\" L x 0.020\" W (1.00mm x 0.50mm)", Supplier 1=DigiKey
C24 C26: library part CL05A475KP5NRNC, "CAP CER 4.7UF 10V X5R 0402", Device Package="0402 (1005 Metric)", manufacturer="Samsung Electro-Mechanics", Operating Temperature="-55°C ~ 85°C", Supplier Part Number 1=1276-1480-1-ND, Temperature Coefficient=X5R, Tolerance=±10%, Voltage - Rated=10V, Applications="General Purpose", Capacitance="4.7 µF", componentlink1description=Datasheet, componentlink1url=http://www.samsungsem.com/kr/support/product-search/mlcc/CL05A475KP5NRNC.jsp, componentlink2description="DigiKey Link", componentlink2url=https://www.digikey.com/en/products/detail/samsung-electro-mechanics/CL05A475KP5NRNC/3887138, lastupdated="9/08/2022 12:01:16 PM", Lifecycle Status=Active, Minimum Order=1, Mounting Type="Surface Mount, MLCC", Package / Case="0402 (1005 Metric)", packaging=TapeAndReel, partid=2191, Part Number=CL05A475KP5NRNC, Part Status=Active, price=0.04, series=CL, Size / Dimension="0.039\" L x 0.020\" W (1.00mm x 0.50mm)", Supplier 1=DigiKey, Thickness (Max)="0.022\" (0.55mm)"
C25 C27 C28 C31: library part LMK105BJ104MC-F, "CAP CER 0.1UF 10V X5R 0402", Device Package="0402 (1005 Metric)", manufacturer="Taiyo Yuden", Operating Temperature="-55°C ~ 85°C", Supplier Part Number 1=587-4572-1-ND, Temperature Coefficient=X5R, Tolerance=±20%, Voltage - Rated=10V, Applications="SMPS Filtering", Capacitance="0.1 µF", componentlink1description=Datasheet, componentlink1url=https://www.yuden.co.jp/productdata/catalog/mlcc01_e.pdf, componentlink2description="DigiKey Link", componentlink2url=https://www.digikey.com/en/products/detail/taiyo-yuden/LMK105BJ104MC-F/6035743, lastupdated="9/08/2022 12:01:16 PM", Lifecycle Status=Active, Minimum Order=1, Mounting Type="Surface Mount, MLCC", Package / Case="0402 (1005 Metric)", packaging=TapeAndReel, partid=2414, Part Number=LMK105BJ104MC-F, Part Status=Active, price=0.03, series=M, Size / Dimension="0.039\" L x 0.020\" W (1.00mm x 0.50mm)", Supplier 1=DigiKey, Thickness (Max)="0.009\" (0.22mm)"
C29: library part LMK105BJ105KPLF, "CAP CER 1UF 10V X5R 0402", Device Package="0402 (1005 Metric)", manufacturer="Taiyo Yuden", Operating Temperature="-55°C ~ 85°C", Supplier Part Number 1=587-6274-1-ND, Temperature Coefficient=X5R, Tolerance=±10%, Voltage - Rated=10V, Applications="SMPS Filtering", Capacitance="1 µF", componentlink1description=Datasheet, componentlink1url="https://ds.yuden.co.jp/TYCOMPAS/ut/detail?pn=LMK105BJ105KPLF &u=M", componentlink2description="DigiKey Link", componentlink2url=https://www.digikey.com/en/products/detail/taiyo-yuden/LMK105BJ105KPLF/7403744, lastupdated="9/08/2022 12:01:16 PM", Lifecycle Status=Active, Minimum Order=1, Mounting Type="Surface Mount, MLCC", Package / Case="0402 (1005 Metric)", packaging=TapeAndReel, partid=2328, Part Number=LMK105BJ105KPLF, Part Status=Active, price=0.02, series=M, Size / Dimension="0.039\" L x 0.020\" W (1.00mm x 0.50mm)", Supplier 1=DigiKey, Thickness (Max)="0.026\" (0.65mm)"
C30: library part LMF105B7103KVHF, "CAP, MLCC, 0402/1005, 10V, X7R,", Device Package="0402 (1005 Metric)", manufacturer="Taiyo Yuden", Operating Temperature="-55°C ~ 125°C", Ratings=AEC-Q200, Supplier Part Number 1=587-6579-1-ND, Temperature Coefficient=X7R, Tolerance=±10%, Voltage - Rated=10V, Applications="Automotive, SMPS Filtering", Capacitance="10000 pF", componentlink1description=Datasheet, componentlink1url=https://ds.yuden.co.jp/TYCOMPAS/ut/detail?pn=LMF105B7103KVHF&u=M, componentlink2description="DigiKey Link", componentlink2url=https://www.digikey.com/en/products/detail/taiyo-yuden/LMF105B7103KVHF/10379145, lastupdated="9/08/2022 12:01:17 PM", Lifecycle Status=Active, Minimum Order=1, Mounting Type="Surface Mount, MLCC", Package / Case="0402 (1005 Metric)", packaging=TapeAndReel, partid=1869, Part Number=LMF105B7103KVHF, Part Status=Active, price=0.01, series=M, Size / Dimension="0.039\" L x 0.020\" W (1.00mm x 0.50mm)", Supplier 1=DigiKey, Thickness (Max)="0.022\" (0.55mm)"
C32 C33: library part 500R07S270GV4T, "CAP CER 27PF 50V C0G/NP0 0402", Device Package="0402 (1005 Metric)", manufacturer="Johanson Technology Inc.", Operating Temperature="-55°C ~ 125°C", Supplier Part Number 1=712-1276-1-ND, Temperature Coefficient="C0G, NP0", Tolerance=±2%, Voltage - Rated=50V, Applications="RF, Microwave, High Frequency", Capacitance="27 pF", componentlink1description=Datasheet, componentlink1url=https://www.johansontechnology.com/downloads/catalog/johanson-technology-multi-layer-high-q-capacitors.pdf, componentlink2description="DigiKey Link", componentlink2url=https://www.digikey.com/en/products/detail/johanson-technology-inc/500R07S270GV4T/1561561, Features="High Q, Low Loss, Ultra Low ESR", lastupdated="9/08/2022 12:01:16 PM", Lifecycle Status=Active, Minimum Order=1, Mounting Type="Surface Mount, MLCC", Package / Case="0402 (1005 Metric)", packaging=TapeAndReel, partid=2172, Part Number=500R07S270GV4T, Part Status=Active, price=0.06, series=S, Size / Dimension="0.040\" L x 0.020\" W (1.02mm x 0.51mm)", Supplier 1=DigiKey, Thickness (Max)="0.024\" (0.61mm)"
C34 C35: library part CL05A105KL5NRNC, "CAP CER 1UF 35V X5R 0402", Device Package="0402 (1005 Metric)", manufacturer="Samsung Electro-Mechanics", Operating Temperature="-55°C ~ 85°C", Supplier Part Number 1=1276-6796-1-ND, Temperature Coefficient=X5R, Tolerance=±10%, Voltage - Rated=35V, Applications="General Purpose", Capacitance="1 µF", componentlink1description=Datasheet, componentlink1url=http://www.samsungsem.com/kr/support/product-search/mlcc/CL05A105KL5NRNC.jsp, componentlink2description="DigiKey Link", componentlink2url=https://www.digikey.com/en/products/detail/samsung-electro-mechanics/CL05A105KL5NRNC/5961280, lastupdated="9/08/2022 12:01:16 PM", Lifecycle Status=Active, Minimum Order=1, Mounting Type="Surface Mount, MLCC", Package / Case="0402 (1005 Metric)", packaging=TapeAndReel, partid=2188, Part Number=CL05A105KL5NRNC, Part Status=Active, price=0.06, series=CL, Size / Dimension="0.039\" L x 0.020\" W (1.00mm x 0.50mm)", Supplier 1=DigiKey, Thickness (Max)="0.022\" (0.55mm)"
C36: library part 0402B472J500CT, "CAP CER 4700PF 50V X7R 0402", Device Package="0402 (1005 Metric)", manufacturer="Walsin Technology Corporation", Operating Temperature="-55°C ~ 125°C", Supplier Part Number 1=1292-1210-1-ND, Temperature Coefficient=X7R, Tolerance=±5%, Voltage - Rated=50V, Applications="General Purpose", Capacitance="4700 pF", componentlink1description=Datasheet, componentlink1url=http://www.passivecomponent.com/wp-content/uploads/2018/10/MLCC.pdf, componentlink2description="DigiKey Link", componentlink2url=https://www.digikey.com/en/products/detail/walsin-technology-corporation/0402B472J500CT/9354708, lastupdated="14/08/2022 9:05:56 PM", Lifecycle Status=Active, Minimum Order=1, Mounting Type="Surface Mount, MLCC", Package / Case="0402 (1005 Metric)", packaging=TapeAndReel, partid=1879, Part Number=0402B472J500CT, Part Status=Active, price=0.01, series=-, Size / Dimension="0.039\" L x 0.020\" W (1.00mm x 0.50mm)", Supplier 1=DigiKey, Thickness (Max)="0.022\" (0.55mm)"
C37: library part C1005NP01H681J050BA, "CAP CER 680PF 50V NP0 0402", Device Package="0402 (1005 Metric)", manufacturer="TDK Corporation", Operating Temperature="-55°C ~ 150°C", Supplier Part Number 1=445-13809-1-ND, Temperature Coefficient="C0G, NP0", Tolerance=±5%, Voltage - Rated=50V, Applications="General Purpose", Capacitance="680 pF", componentlink1description=Datasheet, componentlink1url=https://product.tdk.com/info/en/catalog/datasheets/mlcc_commercial_hightemp_en.pdf?ref_disty=digikey, componentlink2description="DigiKey Link", componentlink2url=https://www.digikey.com/en/products/detail/tdk-corporation/C1005NP01H681J050BA/3951045, Features="High Temperature", lastupdated="14/08/2022 9:05:57 PM", Lifecycle Status=Active, Minimum Order=1, Mounting Type="Surface Mount, MLCC", Package / Case="0402 (1005 Metric)", packaging=TapeAndReel, partid=1790, Part Number=C1005NP01H681J050BA, Part Status=Active, price=0.02, series=C, Size / Dimension="0.039\" L x 0.020\" W (1.00mm x 0.50mm)", Supplier 1=DigiKey, Thickness (Max)="0.022\" (0.55mm)"
C38: library part CBR04C150J5GAC, "CAP CER 15PF 50V C0G/NP0 0402", Device Package="0402 (1005 Metric)", manufacturer=KEMET, Operating Temperature="-55°C ~ 125°C", Supplier Part Number 1=399-6170-1-ND, Temperature Coefficient="C0G, NP0", Tolerance=±5%, Voltage - Rated=50V, Applications="RF, Microwave, High Frequency", Capacitance="15 pF", componentlink1description=Datasheet, componentlink1url=https://api.kemet.com/component-edge/download/datasheet/CBR04C150J5GAC.pdf, componentlink2description="DigiKey Link", componentlink2url=https://www.digikey.com/en/products/detail/kemet/CBR04C150J5GAC/2732287, Features="High Q, Low Loss, Ultra Low ESR", lastupdated="14/08/2022 9:05:58 PM", Lifecycle Status=Active, Minimum Order=1, Mounting Type="Surface Mount, MLCC", Package / Case="0402 (1005 Metric)", packaging=TapeAndReel, partid=1728, Part Number=CBR04C150J5GAC, Part Status=Active, price=0.02, series="CBR-SMD RF C0G", Size / Dimension="0.039\" L x 0.020\" W (1.00mm x 0.50mm)", Supplier 1=DigiKey, Thickness (Max)="0.022\" (0.55mm)"
C39: library part GRM188R6YA225KA12D, "CAP CER 2.2UF 35V X5R 0603", Device Package="0603 (1608 Metric)", manufacturer="Murata Electronics", Operating Temperature="-55°C ~ 85°C", Supplier Part Number 1=490-7204-1-ND, Temperature Coefficient=X5R, Tolerance=±10%, Voltage - Rated=35V, Applications="General Purpose", Capacitance="2.2 µF", componentlink1description=Datasheet, componentlink1url=https://www.murata.com/~/media/webrenewal/support/library/catalog/products/capacitor/mlcc/c02e.ashx?la=en-us, componentlink2description="DigiKey Link", componentlink2url=https://www.digikey.com/en/products/detail/murata-electronics/GRM188R6YA225KA12D/3900462, lastupdated="14/08/2022 9:09:23 PM", Lifecycle Status=Active, Minimum Order=1, Mounting Type="Surface Mount, MLCC", Package / Case="0603 (1608 Metric)", packaging=TapeAndReel, partid=11175, Part Number=GRM188R6YA225KA12D, Part Status=Active, price=0.03, series=GRM, Size / Dimension="0.063\" L x 0.031\" W (1.60mm x 0.80mm)", Supplier 1=DigiKey, Thickness (Max)="0.035\" (0.90mm)"
C40: library part GMJ107CB7105KAHR, "CAP CER 1UF 35V X7R 0603", Device Package="0603 (1608 Metric)", manufacturer="Taiyo Yuden", Operating Temperature="-55°C ~ 125°C", Ratings=AEC-Q200, Supplier Part Number 1=587-4356-1-ND, Temperature Coefficient=X7R, Tolerance=±10%, Voltage - Rated=35V, Applications="Automotive, Boardflex Sensitive", Capacitance="1 µF", componentlink1description=Datasheet, componentlink1url=https://www.yuden.co.jp/productdata/catalog//mlcc11_hq_e.pdf, componentlink2description="DigiKey Link", componentlink2url=https://www.digikey.com/en/products/detail/taiyo-yuden/GMJ107CB7105KAHR/5405535, Features="Soft Termination", lastupdated="14/08/2022 9:09:37 PM", Lifecycle Status=Active, Minimum Order=1, Mounting Type="Surface Mount, MLCC", Package / Case="0603 (1608 Metric)", packaging=TapeAndReel, partid=5874, Part Number=GMJ107CB7105KAHR, Part Status=Active, price=0.06, series=M, Size / Dimension="0.063\" L x 0.031\" W (1.60mm x 0.80mm)", Supplier 1=DigiKey, Thickness (Max)="0.035\" (0.90mm)"
C41 C42 C43: library part C0603C101K5GACAUTO, "CAP CER 100PF 50V C0G/NP0 0603", Device Package="0603 (1608 Metric)", manufacturer=KEMET, Operating Temperature="-55°C ~ 125°C", Ratings=AEC-Q200, Supplier Part Number 1=399-6843-1-ND, Temperature Coefficient="C0G, NP0", Tolerance=±10%, Voltage - Rated=50V, Applications=Automotive, Capacitance="100 pF", componentlink1description=Datasheet, componentlink1url=https://api.kemet.com/component-edge/download/datasheet/C0603C101K5GACAUTO.pdf, componentlink2description="DigiKey Link", componentlink2url=https://www.digikey.com/en/products/detail/kemet/C0603C101K5GACAUTO/3314842, Features="Low ESL", lastupdated="14/08/2022 9:09:47 PM", Lifecycle Status=Active, Minimum Order=1, Mounting Type="Surface Mount, MLCC", Package / Case="0603 (1608 Metric)", packaging=TapeAndReel, partid=2201, Part Number=C0603C101K5GACAUTO, Part Status=Active, price=0.01, series="SMD Auto C0G", Size / Dimension="0.063\" L x 0.031\" W (1.60mm x 0.80mm)", Supplier 1=DigiKey, Thickness (Max)="0.034\" (0.87mm)"
C44 C45 C49 C50 C51 C52 C53 C54 C55 C56 C68 C69 C70 C71 C72 C73 C74 C75 C76 C77: library part GRM21BR61H106KE43L, "CAP CER 10UF 50V X5R 0805", Device Package="0805 (2012 Metric)", manufacturer="Murata Electronics", Operating Temperature="-55°C ~ 85°C", Supplier Part Number 1=490-18663-1-ND, Temperature Coefficient=X5R, Tolerance=±10%, Voltage - Rated=50V, Applications="General Purpose", Capacitance="10 µF", componentlink1description=Datasheet, componentlink1url=https://search.murata.co.jp/Ceramy/image/img/A01X/G101/ENG/GRM21BR61H106KE43-01A.pdf, componentlink2description="DigiKey Link", componentlink2url=https://www.digikey.com/en/products/detail/murata-electronics/GRM21BR61H106KE43L/10326316, lastupdated="14/08/2022 9:12:57 PM", Lifecycle Status=Active, Minimum Order=1, Mounting Type="Surface Mount, MLCC", Package / Case="0805 (2012 Metric)", packaging=TapeAndReel, partid=39284, Part Number=GRM21BR61H106KE43L, Part Status=Active, price=0.07, series=GRM, Size / Dimension="0.079\" L x 0.049\" W (2.00mm x 1.25mm)", Supplier 1=DigiKey, Thickness (Max)="0.057\" (1.45mm)"
C46 C57 C78: library part T495X336M035ATE175, "CAP TANT 33UF 20% 35V 2917", Device Package="2917 (7343 Metric)", ESR (Equivalent Series Resistance)=175mOhm, Lifetime @ Temp.="2000 Hrs @ 85°C", manufacturer=KEMET, Manufacturer Size Code=X, Operating Temperature="-55°C ~ 125°C", Supplier Part Number 1=399-5266-1-ND, Tolerance=±20%, Voltage - Rated="35 V", Capacitance="33 µF", componentlink1description=Datasheet, componentlink1url=https://api.kemet.com/component-edge/download/datasheet/T495X336M035ATE175.pdf, componentlink2description="DigiKey Link", componentlink2url=https://www.digikey.com/en/products/detail/kemet/T495X336M035ATE175/1833502, Features="General Purpose", Height - Seated (Max)="0.169\" (4.30mm)", lastupdated="14/08/2022 9:47:02 PM", Lifecycle Status=Active, Minimum Order=1, Mounting Type="Surface Mount", Package / Case="2917 (7343 Metric)", packaging=TapeAndReel, partid=698, Part Number=T495X336M035ATE175, Part Status=Active, price=1.07, series=T495, Size / Dimension="0.287\" L x 0.169\" W (7.30mm x 4.30mm)", Supplier 1=DigiKey, Type=Molded
C47: library part C0805C474K5RACAUTO, "CAP CER 0.47UF 50V X7R 0805", Device Package="0805 (2012 Metric)", manufacturer=KEMET, Operating Temperature="-55°C ~ 125°C", Ratings=AEC-Q200, Supplier Part Number 1=399-6976-1-ND, Temperature Coefficient=X7R, Tolerance=±10%, Voltage - Rated=50V, Applications="Automotive, Bypass, Decoupling", Capacitance="0.47 µF", componentlink1description=Datasheet, componentlink1url=https://api.kemet.com/component-edge/download/datasheet/C0805C474K5RACAUTO.pdf, componentlink2description="DigiKey Link", componentlink2url=https://www.digikey.com/en/products/detail/kemet/C0805C474K5RACAUTO/3314969, lastupdated="14/08/2022 9:13:14 PM", Lifecycle Status=Active, Minimum Order=1, Mounting Type="Surface Mount, MLCC", Package / Case="0805 (2012 Metric)", packaging=TapeAndReel, partid=2727, Part Number=C0805C474K5RACAUTO, Part Status=Active, price=0.06, series="SMD Auto X7R", Size / Dimension="0.079\" L x 0.049\" W (2.00mm x 1.25mm)", Supplier 1=DigiKey, Thickness (Max)="0.043\" (1.10mm)"
C48: library part C0603C104K5RAC7411, "CAP CER 0.1UF 50V X7R 0603", Device Package="0603 (1608 Metric)", manufacturer=KEMET, Operating Temperature="-55°C ~ 125°C", Supplier Part Number 1=399-7374-2-ND, Temperature Coefficient=X7R, Tolerance=±10%, Voltage - Rated=50V, Applications="Bypass, Decoupling", Capacitance="0.1 µF", componentlink1description=Datasheet, componentlink1url=https://api.kemet.com/component-edge/download/datasheet/C0603C104K5RAC7411.pdf, componentlink2description="DigiKey Link", componentlink2url=https://www.digikey.com/en/products/detail/kemet/C0603C104K5RAC7411/3317013, lastupdated="14/08/2022 9:09:47 PM", Lifecycle Status=Active, Minimum Order=15000, Mounting Type="Surface Mount, MLCC", Package / Case="0603 (1608 Metric)", packaging=TapeAndReel, partid=2233, Part Number=C0603C104K5RAC7411, Part Status=Active, price=0.01, series="SMD Comm X7R", Size / Dimension="0.063\" L x 0.031\" W (1.60mm x 0.80mm)", Supplier 1=DigiKey, Thickness (Max)="0.035\" (0.90mm)"